# Altium PCB MAX274-P.PcbDoc
Units mil, origin at the board's own origin, x right, y up, seen from the top; angles counter-clockwise.
Board outline 1667 x 1527 mil, 2 copper layers (Top Layer, Bottom Layer); 46 components, 31 nets, 130 pads, 38 vias.
Unrouted connection lines stored in the file: 21.
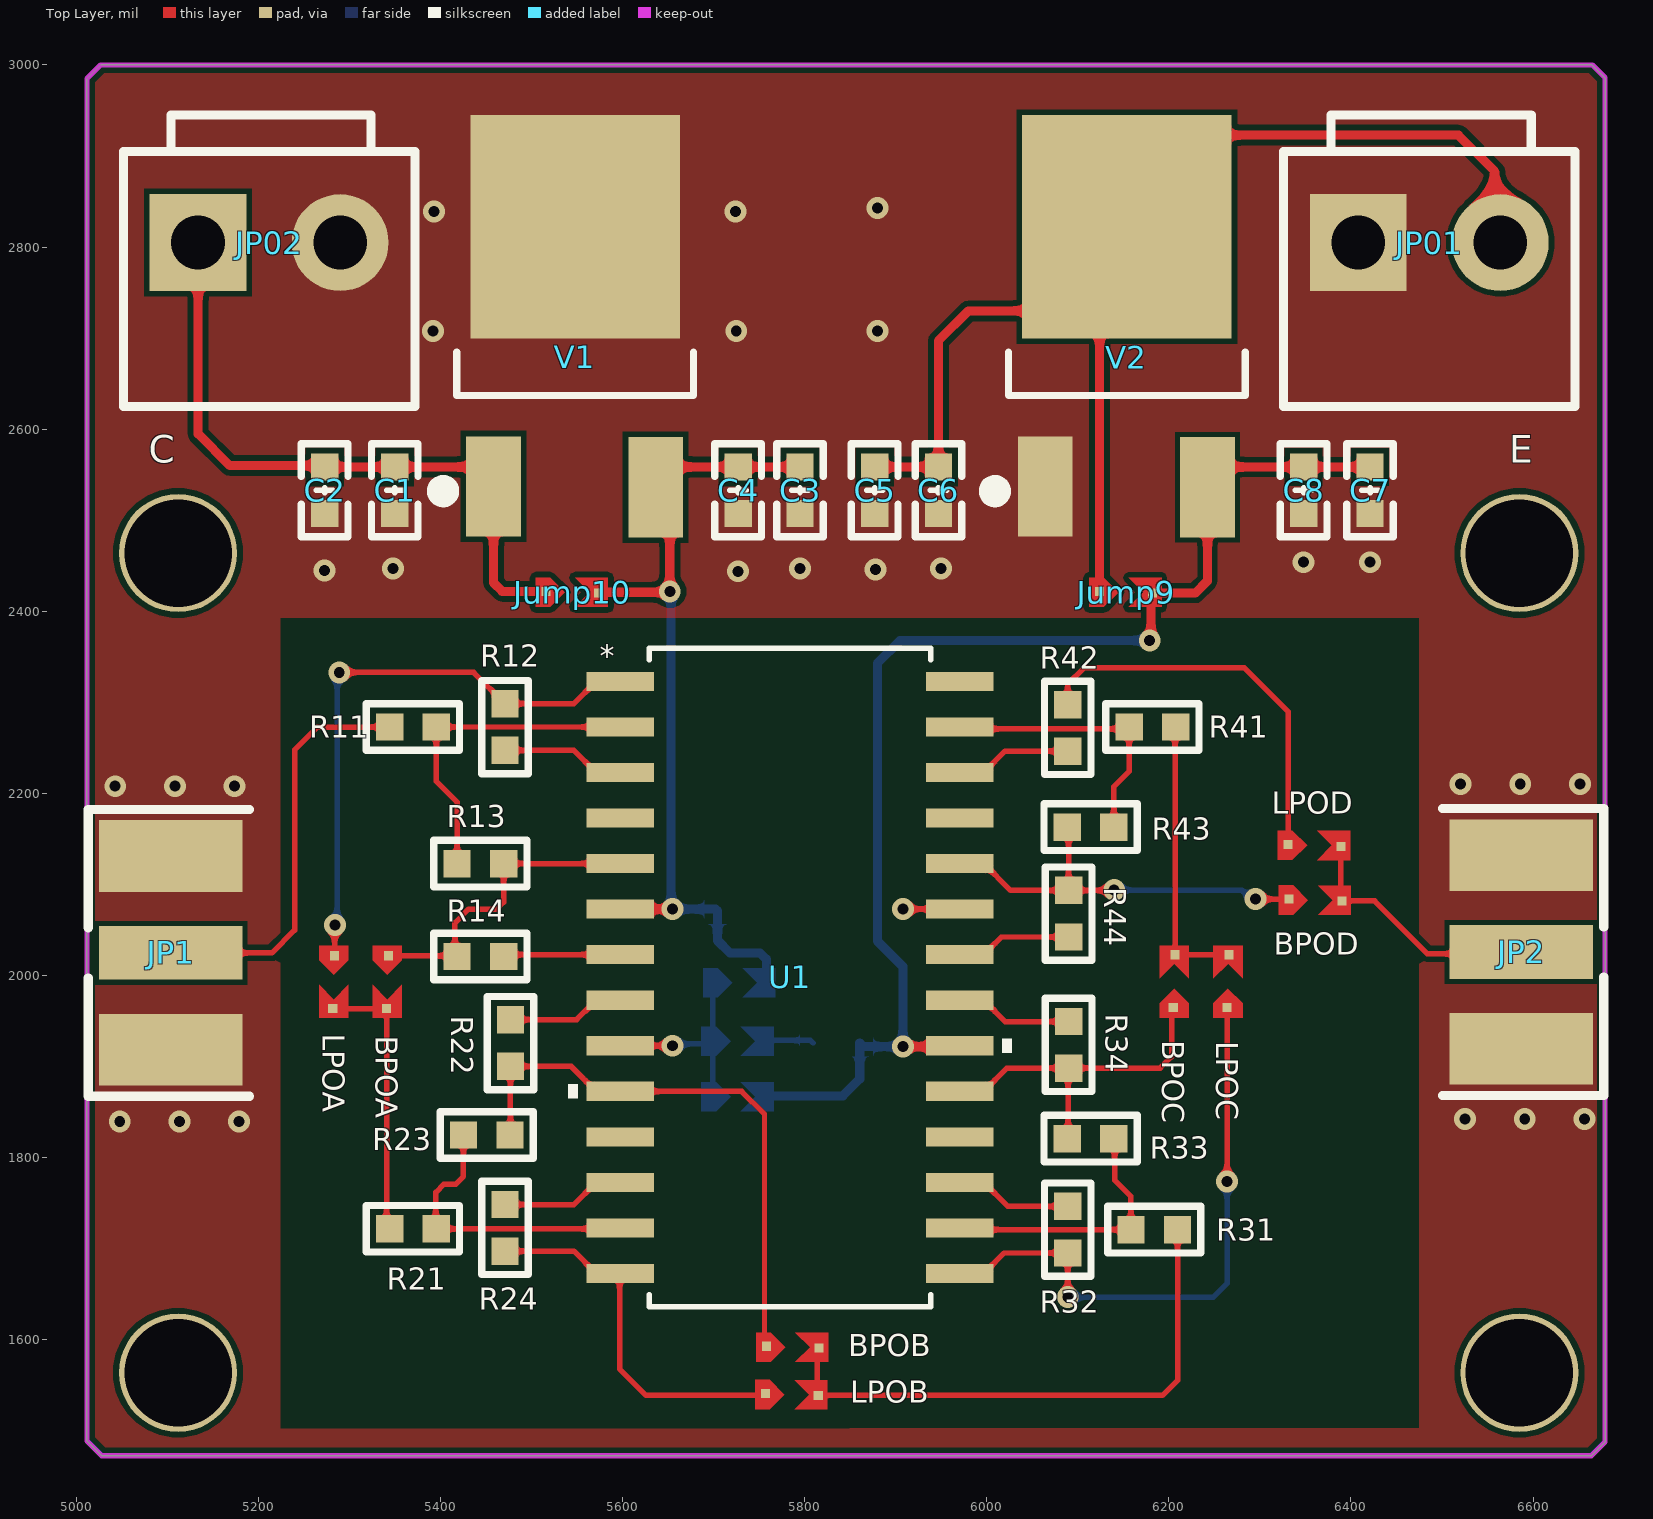
[diagram p0: Top Layer view]
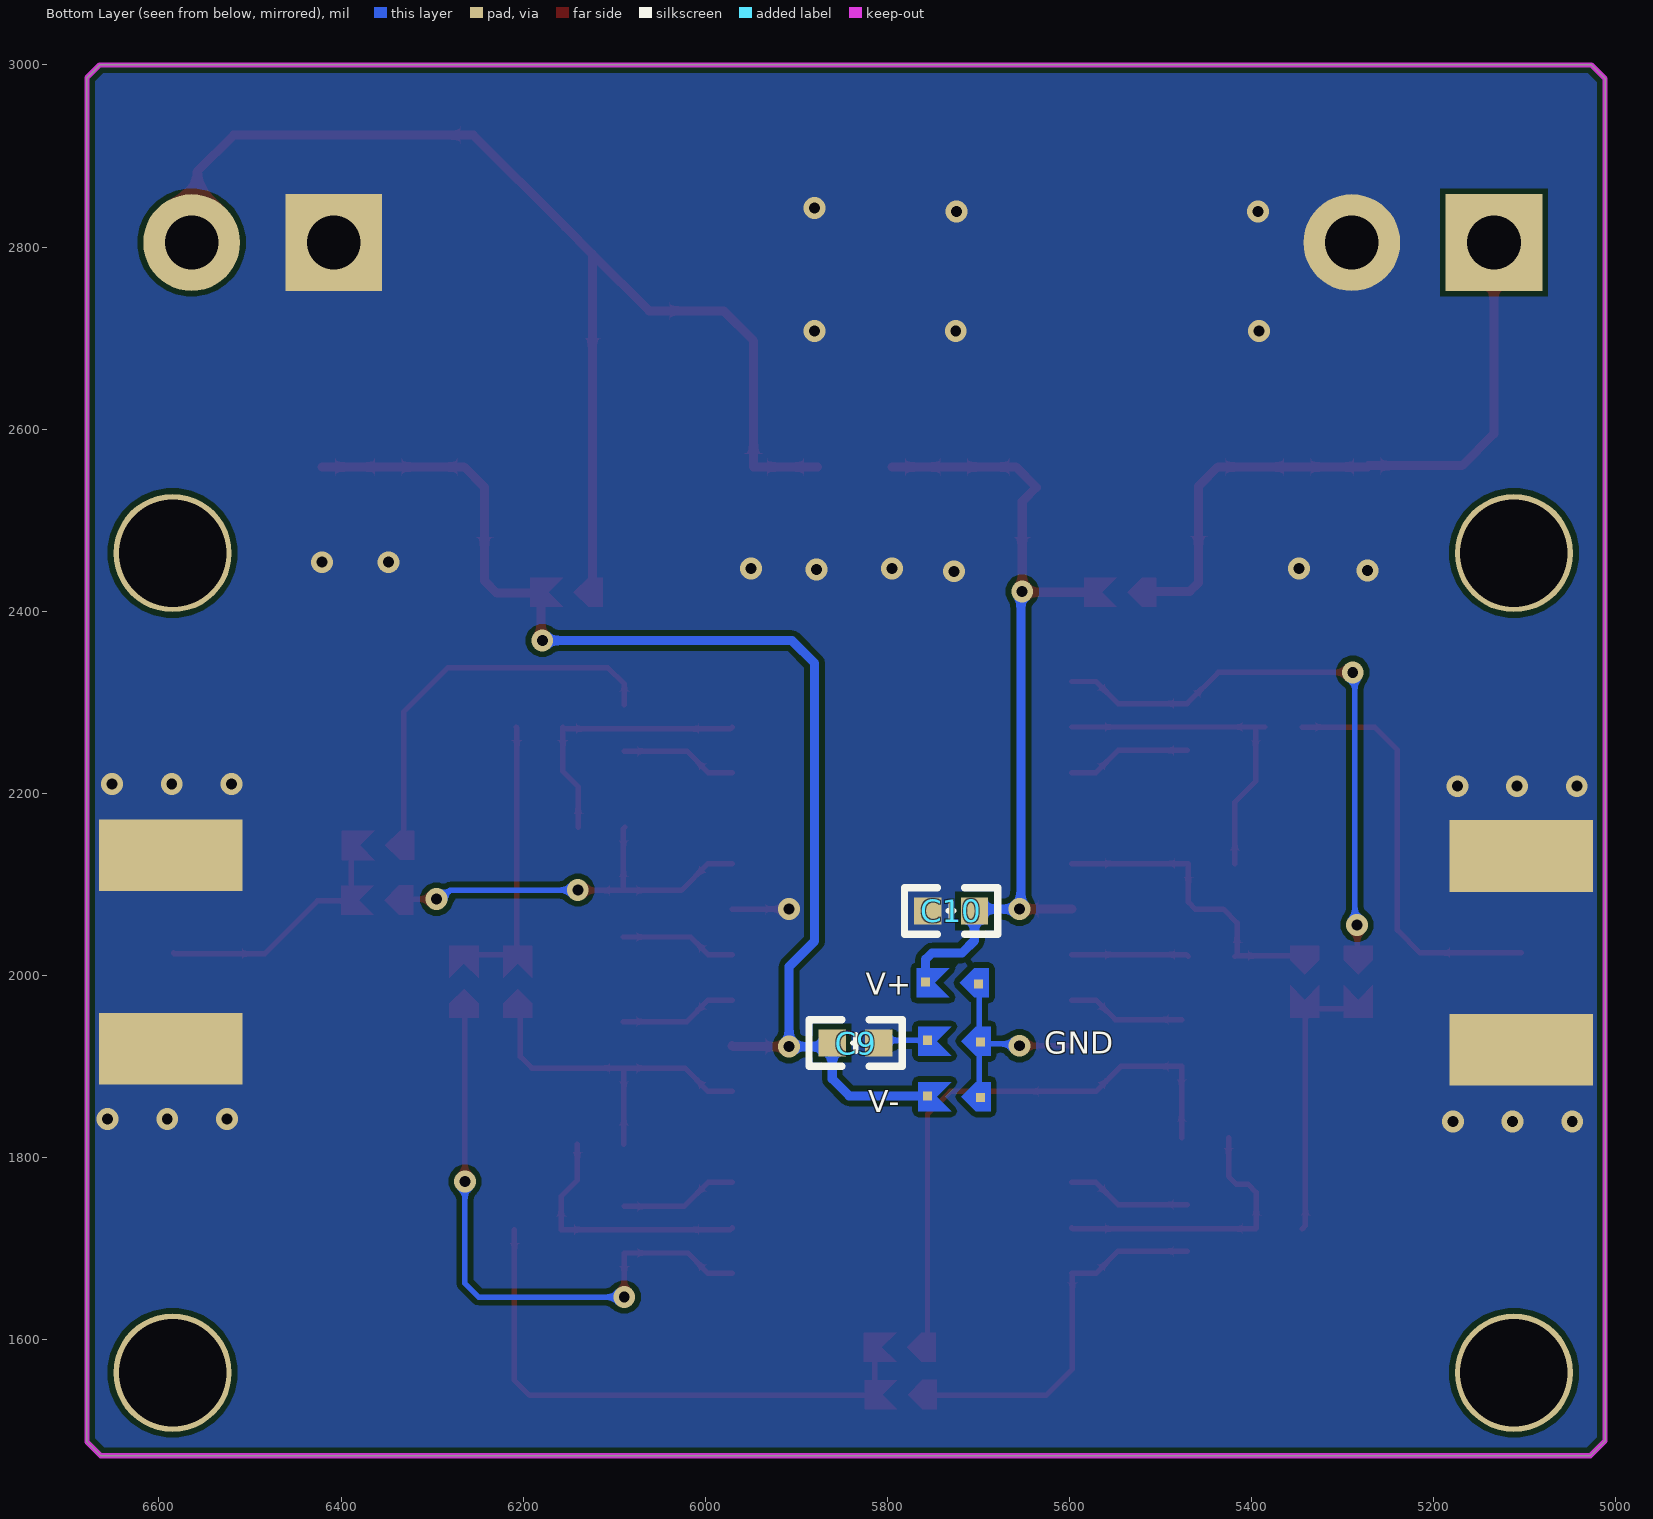
[diagram p1: Bottom Layer view, seen from below]
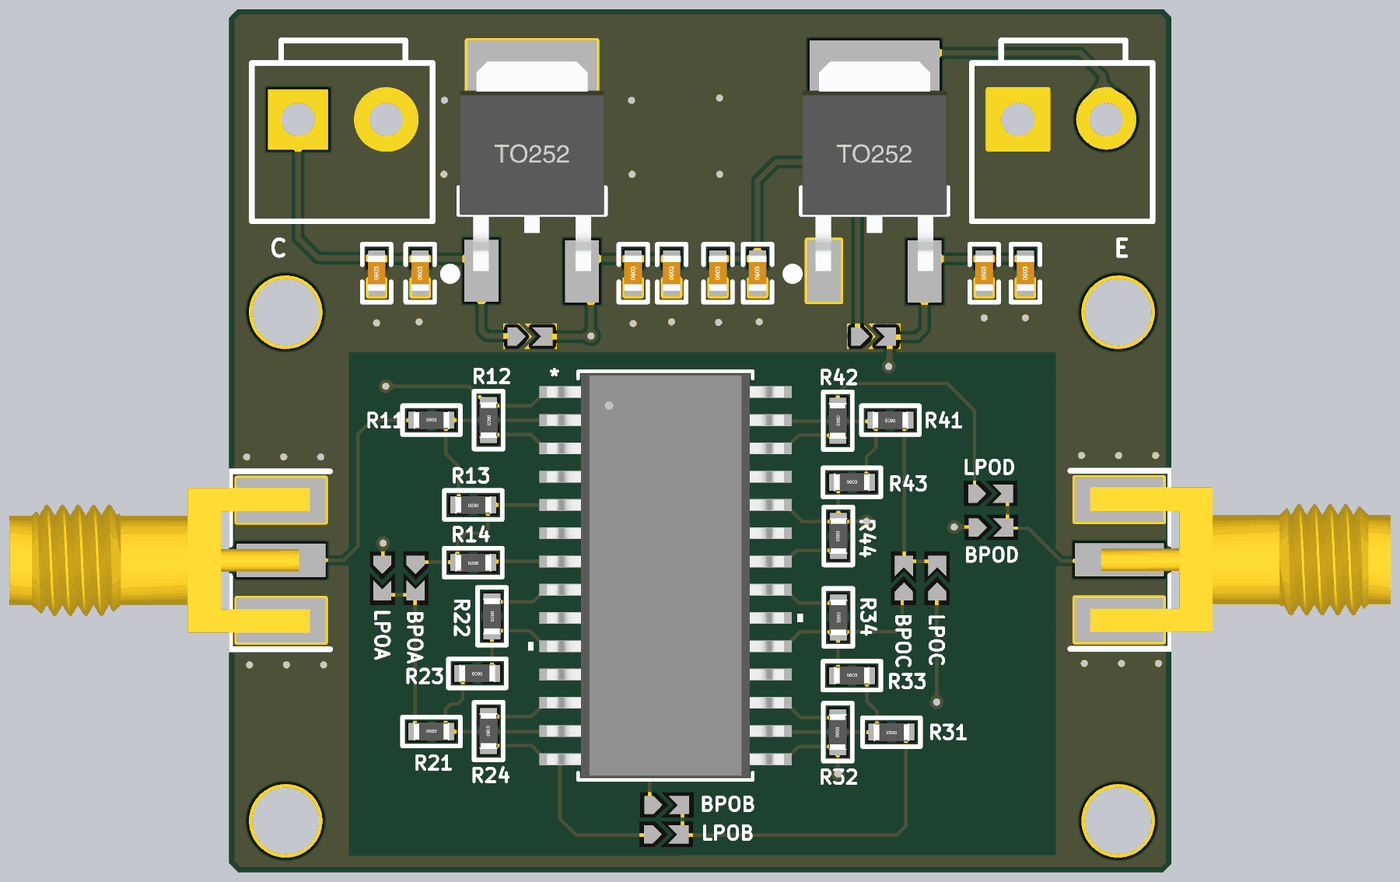
[diagram p2: 3D render of the assembled board from above, using the file's embedded part models]

## Layer stack, top to bottom
Top Solder: solder mask 0.4, Solder Resist, Dk 3.5
Top Layer: signal copper 1.4
Dielectric 1: dielectric 12.6, FR-4, Dk 4.8
Bottom Layer: signal copper 1.4
Bottom Solder: solder mask 0.4, Solder Resist, Dk 3.5

## Board outline
5012,1489 5012,2985 5027,3000 6665,3000 6679,2986 6679,1488 6664,1473 5028,1473

## Design rules (kind name [scope] priority, off if disabled: settings)
Clearance [All] p1: gap=6 ignorepadtopadclearanceinfootprint=FALSE except(0: Arc-Hole Track-Hole SMDPad-Hole THPad-Hole Via-Hole Fill-Hole Poly-Hole Region-Hole Text-Hole)
PolygonConnect [All] p1: connectstyle=Direct reliefconductorwidth=10 reliefentries=4 polygonreliefangle="90 Angle" airgapwidth=10
RoutingVias [All] p1: holewidth=28 width=50 viastyle="Through Hole" minholewidth=28 minwidth=50 maxholewidth=28 maxwidth=50
SolderMaskExpansion [All] p1: expansion=4 istentingtop=FALSE
Width [All] p1: maxlimit=10 minlimit=6 preferedwidth=6
30 further rules are at their usual default settings.

## Components (designator, comment, footprint, x,y, rotation, side; value= is the part's Value field where it differs from the comment)
BPOA "JumpPad" Jump 5342.93,1983.79 r270 top (schematic designator Jump2)
BPOB "JumpPad" Jump 5796,1593 r0 top (schematic designator Jump4)
BPOC "JumpPad" Jump 6204.87,2002.97 r90 top (schematic designator Jump6)
BPOD "JumpPad" Jump 6370,2084 r0 top (schematic designator Jump8)
C1 "10uF" "C 0603_L" 5350,2533 r90 top
C2 "100nF" "C 0603_L" 5273,2533 r90 top
C3 "100nF" "C 0603_L" 5795,2533 r90 top
C4 "10uF" "C 0603_L" 5727,2533 r90 top
C5 "10uF" "C 0603_L" 5877,2533 r90 top
C6 "100nF" "C 0603_L" 5947,2533 r90 top
C7 "100nF" "C 0603_L" 6421,2533 r90 top
C8 "10uF" "C 0603_L" 6348,2533 r90 top
C9 "100nF" "C 0603_L" 5835,1926 r0 bottom
C10 "100nF" "C 0603_L" 5730,2071 r180 bottom
GND "JumpPad" Jump 5736,1927 r0 bottom (schematic designator Jump12)
JP01 "HDR-1X2" VH3.96-LI-2P 6486,2805 r0 top
JP1 "SMA WIFI 天线接口" SMA-KE 5104,2025 r90 top
JP02 "HDR-1X2" VH3.96-LI-2P 5212,2805 r0 top
JP2 "SMA WIFI 天线接口" SMA-KE 6587,2026 r270 top
Jump9 "JumpPad" Jump 6162,2422 r0 top
Jump10 "JumpPad" Jump 5554,2422 r0 top
LPOA "JumpPad" Jump 5283.93,1983.79 r270 top (schematic designator Jump1)
LPOB "JumpPad" Jump 5795,1541 r0 top (schematic designator Jump3)
LPOC "JumpPad" Jump 6263.93,2002.97 r90 top (schematic designator Jump5)
LPOD "JumpPad" Jump 6369,2144 r0 top (schematic designator Jump7)
R11 "NC" "R 0603_L" 5370,2273 r0 top
R12 "NC" "R 0603_L" 5471,2273 r270 top
R13 "NC" "R 0603_L" 5444,2123 r180 top
R14 "NC" "R 0603_L" 5444,2021 r180 top
R21 "NC" "R 0603_L" 5370,1722 r0 top
R22 "NC" "R 0603_L" 5471,1723 r90 top
R23 "NC" "R 0603_L" 5451,1825 r180 top
R24 "NC" "R 0603_L" 5477,1926 r270 top
R31 "NC" "R 0603_L" 6184,1721 r180 top
R32 "NC" "R 0603_L" 6089,1721 r90 top
R33 "NC" "R 0603_L" 6114,1821 r0 top
R34 "NC" "R 0603_L" 6090,1924 r270 top
R41 "NC" "R 0603_L" 6182,2273 r180 top
R42 "NC" "R 0603_L" 6089,2272 r270 top
R43 "NC" "R 0603_L" 6114,2163 r0 top
R44 "NC" "R 0603_L" 6090,2068 r90 top
U1 "MAX274AEWI+" 21-0042B_28_MXM 5784,1998 r0 top
V1 "78xx" TO252 5548,2657 r0 top
V2 "79xx" TO252 6154,2657 r0 top
V+ "JumpPad" Jump 5738,1991 r0 bottom (schematic designator Jump13)
V- "JumpPad" Jump 5736,1866 r0 bottom (schematic designator Jump11)

## Footprints (in the part's own frame and the unit in brackets; to place one, negate y for a bottom-side part, rotate by r counter-clockwise, add the part's x,y. Pads: shape width x height; smd on the part's side, far side on the other; paste and mask are expansions set on the pad)
21-0042B_28_MXM [mil]
  rect 73.78x20.97 smd paste+0 mask+0: 1(-186.39,325) 2(-186.39,275) 3(-186.39,225) 4(-186.39,175) 5(-186.39,125) 6(-186.39,75) 7(-186.39,25) 8(-186.39,-25) 9(-186.39,-75) 10(-186.39,-125) 11(-186.39,-175) 12(-186.39,-225) 13(-186.39,-275) 14(-186.39,-325) 15(186.39,-325) 16(186.39,-275) 17(186.39,-225) 18(186.39,-175) 19(186.39,-125) 20(186.39,-75) 21(186.39,-25) 22(186.39,25) 23(186.39,75) 24(186.39,125) 25(186.39,175) 26(186.39,225) 27(186.39,275) 28(186.39,325)
  silkscreen extent -243,-362 243,362, body extent -209,-356 209,356, height 104
"C 0603_L" [mil] "无极性贴片电容"
  rect 30x30 smd: 1(-25.59,0) 2(25.59,0)
  silkscreen extent -51,-26 51,26, body extent -31,-16 31,16, height 32
Jump [mil] "跳线焊盘"
  rect 10x10 smd: 1(-38,0) 2(20,-2)
  Top Layer region: -49.21,-17.03 -49.21,14.97 -33.21,14.97 -17.21,-1.03 -33.21,-17.03
  Top Layer region: -5.97,-17.07 30.03,-17.07 30.03,14.93 -5.97,14.93 10.03,-1.07
  body extent -34,-17 16,15, height 10
"R 0603_L" [mil] "1/10W贴片电阻"
  rect 30x30 smd: 1(-25.59,0) 2(25.59,0)
  silkscreen extent -51,-26 51,26, body extent -31,-16 32,16, height 16
SMA-KE [mm] "SMA 偏脚射频天线座"
  rect 1.5x4 smd: 1(0,0)
  rect 2x4 smd: 2(-2.7,0) 2(2.7,0)
  rect 2x4 smd far side: 3(-2.7,0) 3(2.7,0)
  silkscreen extent -4,-2.2 4,2.3, body extent -3.25,-1.3 3.25,12.2, height 3.75
TO252 [mil] "252晶体管"
  rect 60x110 smd: 1(-89.55,-119.77) 3(88.45,-120.77)
  rect 230x245 smd: 2(0,165.35)
  silkscreen extent -153,-133 130,28, body extent -128,-120 128,251, height 91
VH3.96-LI-2P [mm] "接插件，25V/5A"
  rect 2.7x2.7 hole 1.5: 1(-1.98,0)
  round 2.7 hole 1.5: 2(1.982,0)
  silkscreen extent -4.06,-4.57 4.07,3.56, body extent -3.98,-4.4 4.03,4.16, height 10.5

## Part data
BPOA BPOB BPOC BPOD GND Jump9 Jump10 LPOA LPOB LPOC LPOD V+ V-: "跳线焊盘"
C1 C2 C3 C4 C5 C6 C7 C8 C9 C10: library part C, "无极性贴片电容", BOM名称=无极性贴片电容, 学习资源=www.ooocke.com, 版权归属=源创客
JP01 JP02: library part "Header 2_1", "2P接插件", BOM名称=2P接插件, 学习资源=www.ooocke.com, 版权归属=源创客
JP1 JP2: library part SMA, "SMA-2.4G射频天线接口", BOM名称=SMA-2.4G射频天线接口, 学习资源=www.ooocke.com, 版权归属=源创客
R11 R12 R13 R14 R21 R22 R23 R24 R31 R32 R33 R34 R41 R42 R43 R44: library part R, "贴片电阻", BOM名称=贴片电阻, 学习资源=www.ooocke.com, 版权归属=源创客
U1: "No Description Available", Mfr_Name="Maxim Integrated Products", Copyright="Copyright (C) 2022 Ultra Librarian. All rights reserved.", Manufacturer_Part_Number=MAX274AEWI+, RefDes=RefDes, Type=DEV
V1 V2: "线性稳压芯片", BOM名称=线性稳压芯片, 学习资源=www.ooocke.com, 版权归属=源创客

## Free pads (board coordinates)
  round 129.92 hole 118.11: 2(5112,1564) 2(5112,2464) 2(6585,1564) 2(6585,2464)

## Via types
v1: diameter 24, hole 12, Top Layer to Bottom Layer, tented both sides, 38 vias

## Nets (pads, with @x,y where several pads share a name; then routed paths per layer and width w, separated by ;. In a path a pad name is that pad's centre, name@x,y a point inside that pad or via, vN(x,y) a via of type N, cw(c..) or ccw(c..) an arc to the next point about the centre after c; other vN are vias at no path point)
BPIA: R12.2 U1.3 | length 136.7
  Top Layer w6: R12.2 5546.79,2247.41 5571.2,2223 U1.3
BPIB: R22.2 U1.12 | length 136.7
  Top Layer w6: R22.2 5546.79,1748.59 5571.2,1773 U1.12
BPIC: R32.2 U1.17 | length 129.6
  Top Layer w6: U1.17 5996.8,1773 6023.21,1746.59 R32.2
BPID: R42.2 U1.26 | length 128.3
  Top Layer w6: U1.26 5996.8,2223 6020.21,2246.41 R42.2
BPOA: BPOA.1 R13.1 R14.2 U1.5 | length 346.1
  Top Layer w6: BPOA.1 R14.2@5417.63,2021.79 ; R14.2 R14.2@5417.63,2021.79 ; U1.5 R13.1 5469.59,2080.59 5462,2073 5431,2073 5416,2058 5416,2023.42 R14.2@5417.63,2021.79
BPOB: BPOB.1 R23.1 R24.2 U1.10 | length 634.3
  Top Layer w6: R23.1@5476.59,1822 5477,1822.41 R24.2 5543.79,1900.41 5571.2,1873 U1.10 5731,1873 5756,1848 BPOB.1@5756,1593
BPOC: BPOC.1 R33.1 R34.2 U1.19 | length 386.8
  Top Layer w6: U1.19 5996.8,1873 6022.21,1898.41 R34.2 ; R33.1@6089.41,1815 6089.41,1897.82 R34.2 ; BPOC.1 6203,1963.1 6203,1911 6190.41,1898.41 R34.2
BPOD: BPOD.1 R43.1 R44.2 U1.24 | length 448.2
  Top Layer w6: U1.24 5996.8,2123 6026.21,2093.59 R44.2 ; R43.1 6090,2161.4 R44.2 ; v1(6140,2094) 6139.59,2093.59 R44.2 ; v1(6295,2084) BPOD.1
  Bottom Layer w6: v1(6140,2094) 6280.13,2094 6290.13,2084 v1(6295,2084)
FC: GND.1 U1.9 V+.1 V-.1 | length 227.9
  Top Layer w6: U1.9 v1(5655,1923)
  Bottom Layer w6: v1(5655,1923) 5657,1925 5696,1925 GND.1 ; V-.1 5699,1867 5699,1990 V+.1
GND: C1.1 C2.1 C3.1 C4.1 C5.1 C6.1 C7.1 C8.1 C9.1 C10.1 GND.2 JP01.1 JP1.2 JP1.3 JP2.2 JP02.2 JP2.3 U1.23 V1.2 V2.1 | length 117
  Top Layer w6: v1(5908,2073) U1.23
  Bottom Layer w6: GND.2 5806.41,1929 C9.1
  other v1: 5048,1840 5113.5,1840 5179,1840 6525.39,1842.55 6590.89,1842.55 6656.39,1842.55 5043,2208 5108.5,2208 5174,2208 6520.39,2210.55 6585.89,2210.55 6651.39,2210.55 5727,2444 5273,2445 5878,2446 5348,2447 5795,2447 5950,2447 6348,2454 6421,2454 5392,2708 5725,2708 5880,2708 5393,2839 5724,2839 5880,2843
INA: R11.2 R13.2 U1.2 | length 371.6
  Top Layer w6: R11.2@5385.44,2273 U1.2 ; R11.2 5395.59,2213.41 5418.41,2190.59 R13.2
INB: R21.2 R23.2 U1.13 | length 322.9
  Top Layer w6: R23.2@5425.41,1822 5425.41,1779.41 5417,1771 5404,1771 5395,1762 5395,1722.58 R21.2 5596.61,1722 U1.13
INC: R31.2 R33.2 U1.16 | length 290.2
  Top Layer w6: U1.16 5972.39,1721 R31.2 6158.41,1757.59 6140.59,1775.41 R33.2@6140.59,1815
IND: R41.2 R43.2 U1.27 | length 303.8
  Top Layer w6: U1.27 5972.39,2271 R41.2@6156.41,2271 ; R43.2 6139.59,2207.59 6156.41,2224.41 R41.2
LPIA: R14.1 U1.7 | length 128.8
  Top Layer w6: R14.1 5471.59,2023 U1.7
LPIB: R24.1 U1.8 | length 129.5
  Top Layer w6: R24.1 5549.8,1951.59 5571.2,1973 U1.8
LPIC: R34.1 U1.21 | length 129.3
  Top Layer w6: U1.21 5996.8,1973 6020.2,1949.59 R34.1
LPID: R44.1 U1.22 | length 127.7
  Top Layer w6: U1.22 5996.8,2023 6016.2,2042.41 R44.1
LPOA: LPOA.1 R12.1 U1.1 | length 647
  Top Layer w6: LPOA.1 5283.93,2054.93 v1(5284.47,2055.47) v1@5285,2056 ; v1(5289,2333) 5436.59,2333 R12.1 5546.8,2298.59 5571.2,2323 U1.1
  Bottom Layer w6: v1(5284.47,2055.47) 5286.73,2057.73 5286.73,2330.73 v1(5289,2333)
LPOB: LPOB.1 R22.1 U1.14 | length 414.9
  Top Layer w6: R22.1 5546.8,1697.41 5571.2,1673 U1.14 5597,1672.39 5597,1568 5626,1539 LPOB.1@5757.94,1539
LPOC: LPOC.1 R32.1 U1.15 | length 660.5
  Top Layer w6: U1.15 5996.8,1673 6019.2,1695.41 R32.1 v1(6089,1647) ; LPOC.1 v1(6263.93,1774.07) v1@6264,1774
  Bottom Layer w6: v1(6089,1647) 6248.87,1647 6263.93,1662.07 v1(6263.93,1774.07)
LPOD: LPOD.1 R42.1 | length 437.7
  Top Layer w6: R42.1 6089,2320 6107,2338 6283,2338 6331,2290 LPOD.1
NetJump1_2: BPOA.2 LPOA.2 R21.1 | length 302.2
  Top Layer w6: LPOA.2 BPOA.2 5340.93,1725.47 R21.1
NetJump3_2: BPOB.2 LPOB.2 R31.1 | length 619.9
  Top Layer w6: BPOB.2@5814,1591 5814,1539 6193,1539 6209.59,1555.59 R31.1
NetJump5_2: BPOC.2 LPOC.2 R41.1 | length 309.4
  Top Layer w6: R41.1 6206.87,2272.28 BPOC.2 LPOC.2
SignalIN: JP1.1 R11.1 | length 459.1
  Top Layer w6: JP1.1 5215,2025 5240,2050 5240,2248 5265,2273 R11.1
SignalOUT: BPOD.2 JP2.1 LPOD.2 | length 278.9
  Top Layer w6: LPOD.2 6389,2083 BPOD.2 6426,2082 6484,2024 6583,2024 JP2.1@6584,2025
V+: C3.2 C4.2 C10.2 Jump10.2 U1.6 V1.3 V+.2 | length 944.7
  Top Layer w10: Jump10.2 5575,2421 5651,2421 v1(5652,2422) 5652,2520.68 V1.3 5658.81,2558.59 C4.2 C3.2 ; U1.6 v1(5655,2073)
  Bottom Layer w10: v1(5652,2422) 5653.5,2420.5 5653.5,2074.5 v1(5655,2073) 5702.41,2073 C10.2 5704.41,2038.59 5718,2025 5751,2025 5758,2018 V+.2
V-: C7.2 C8.2 C9.2 Jump9.2 U1.20 V2.3 V-.2 | length 1415.4
  Top Layer w10: v1(5908,1922) 5969.39,1922 U1.20 ; v1(6179,2368) 6180.5,2369.5 6180.5,2418.5 Jump9.2 6229,2420 6242.45,2433.45 V2.3 6264.81,2558.59 C8.2 C7.2
  Bottom Layer w10: V-.2 5842,1868 5860.59,1886.59 C9.2 5864.59,1922 v1(5908,1922) 5908,2010 5880,2038 5880,2343 5905,2368 v1(6179,2368)
VCC: C1.2 C2.2 JP02.1 Jump10.1 V1.1 | length 725.5
  Top Layer w10: JP02.1 5134.05,2594.95 5169,2560 5271.59,2560 C2.2 C1.2 5437.09,2558.59 V1.1 5458.45,2431.55 5468,2422 Jump10.1
VEE: C5.2 C6.2 JP01.2 Jump9.1 V2.2 | length 1367.4
  Top Layer w10: C5.2 C6.2 5947,2697 5980,2730 6061.65,2730 V2.2@6124,2792.35 ; Jump9.1 V2.2@6124,2792.35 ; JP01.2@6571.05,2821 6557.85,2834.2 6557.85,2883.15 6518,2923 6254.65,2923 V2.2 V2.2@6124,2792.35
pads on no net: U1.4 U1.11 U1.18 U1.25 U1.28

## Polygon pours and split planes (outlines as drawn)
GND on Top Layer "GND_L01_P000" (solid, remove dead copper, pour order 0): 5027,3000 5012,2985 5012,1489 5028,1473 6664,1473 6679,1488 6679,2986 6665,3000
GND on Bottom Layer "GND_L02_P001" (solid, remove dead copper, pour order 1): 5027,3000 5012,2985 5012,1489 5028,1473 6664,1473 6679,1488 6679,2986 6665,3000

## Keep-outs
Keep-Out Layer:
  the board outline again, w6

## Other copper
Top Layer:
  pour cut-out: 5224,2393 5224,1502.52 6475,1503.48 6475,2393

## Silkscreen, mask and mechanical layers (free items; w line width, h text height)
Top Overlay:
  text "C" at 5080,2563 h30
  text "E" at 6574,2563 h30
Mechanical 1:
  lines w1: 5012,1489 5028,1473 6664,1473 6679,1488 6679,2986 6665,3000 5047,3000 5027,3000 5012,2985 5012,1515 5012,1489

## Text inside footprints (layer, text, board x,y; h text height)
U1: Top Overlay "*" at 5575.11,2338.97 h24; Mechanical 13 "*" at 5637,2301.5 h24